# Altium PCB PCB_SequenceCounter.PcbDoc
Units mil, origin at the board's own origin, x right, y up, seen from the top; angles counter-clockwise.
Board outline 3293.81 x 1300.98 mil, 2 copper layers (Top Layer, Bottom Layer), stack 65.792 mil thick; 28 components, 26 nets, 77 pads, 14 vias.
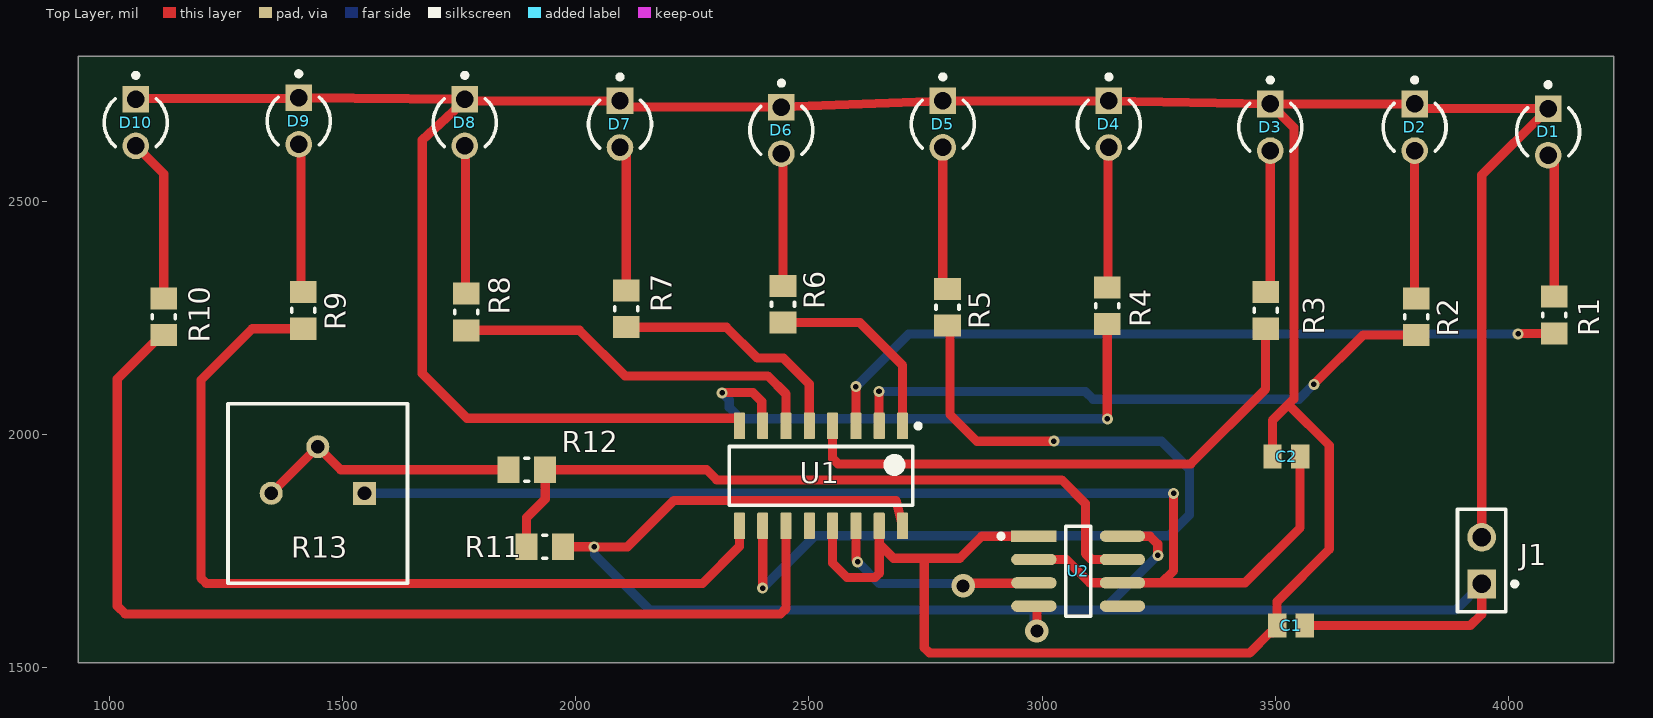
[diagram p0: Top Layer view]
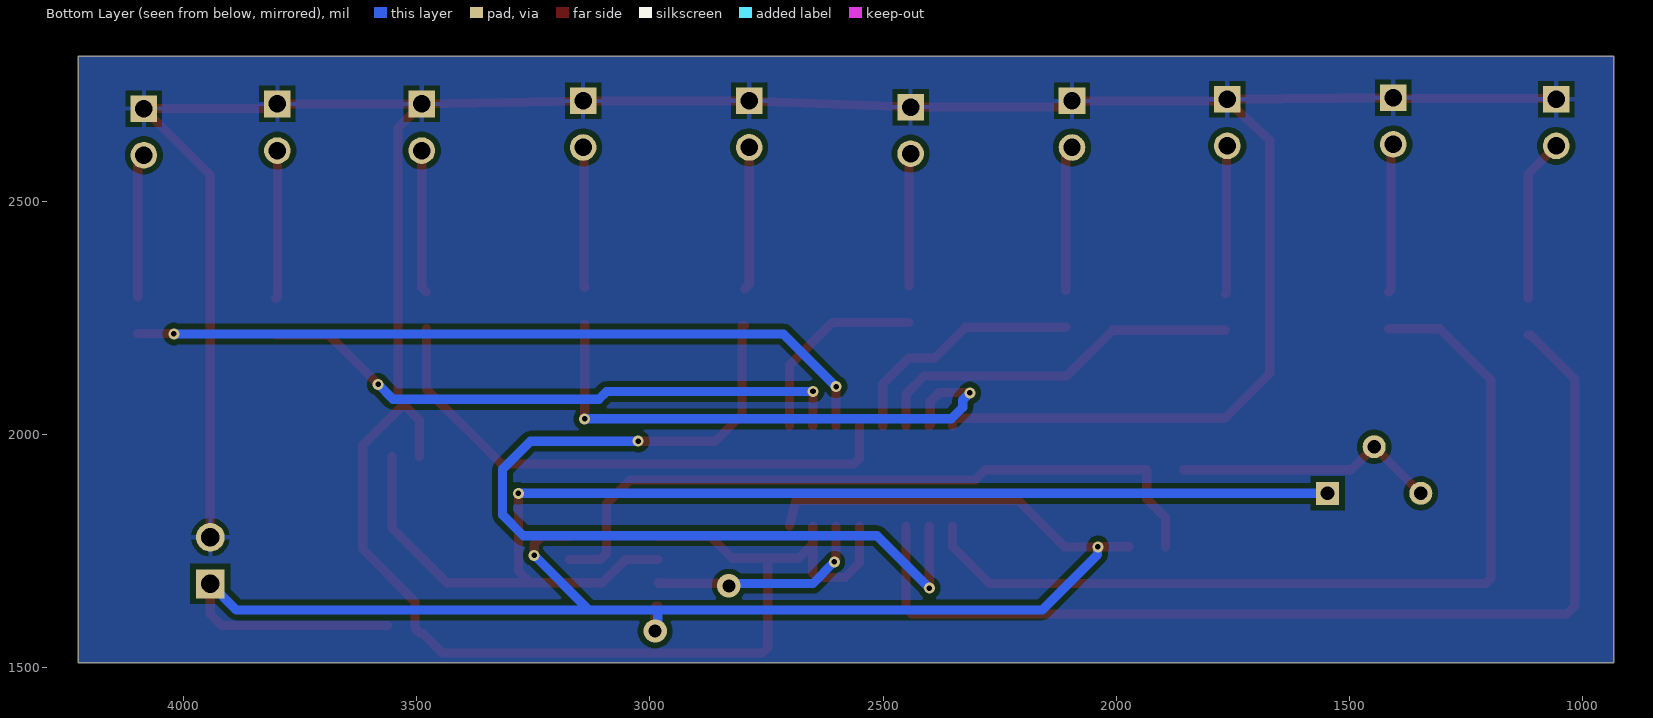
[diagram p1: Bottom Layer view, seen from below]
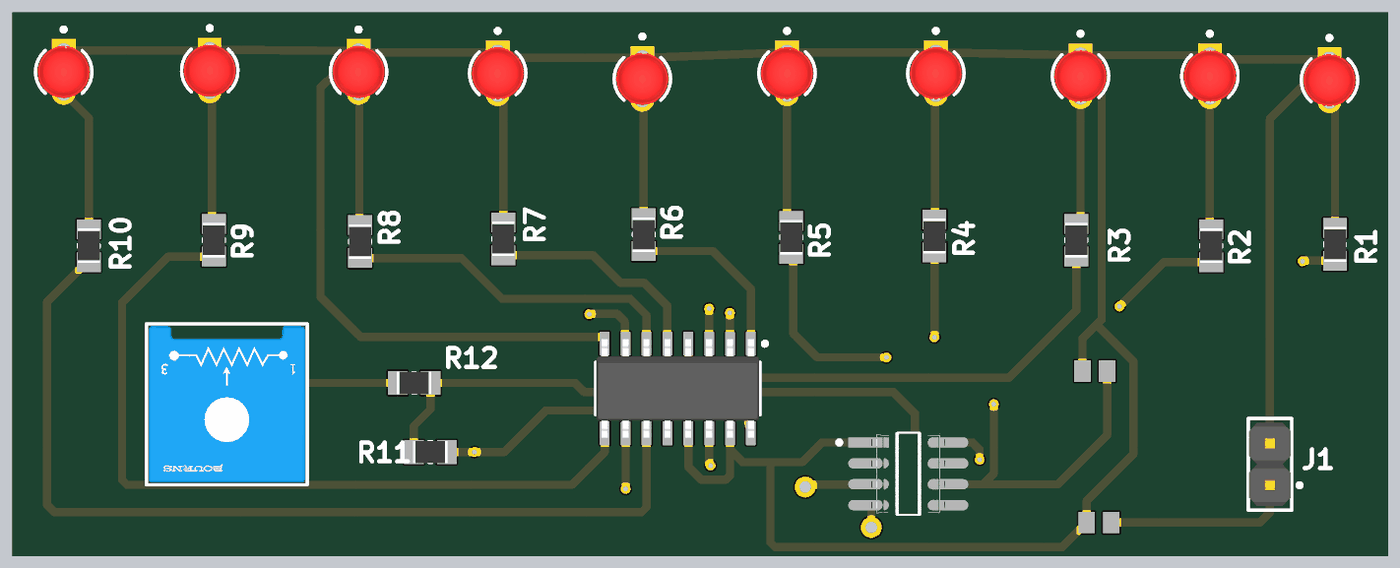
[diagram p2: 3D render of the assembled board from above, using the file's embedded part models]

## Layer stack, top to bottom
Top Solder: solder mask 0.4, Solder Resist, Dk 3.5
Top Layer: signal copper 1.4
Dielectric 1: dielectric 62.9921, FR-4, Dk 4.8
Bottom Layer: signal copper 1.4
Bottom Solder: solder mask 0.4, Solder Resist, Dk 3.5

## Board outline
932.56,1510.18 4226.38,1510.18 4226.38,2811.16 932.56,2811.16

## Design rules (kind name [scope] priority, off if disabled: settings)
Clearance [All] p1: gap=11.81 ignorepadtopadclearanceinfootprint=FALSE
PolygonConnect [All] p1: connectstyle=Relief reliefconductorwidth=10 reliefentries=4 polygonreliefangle="90 Angle" airgapwidth=10
RoutingVias [All] p1: holewidth=11.81 width=23.62 viastyle="Through Hole" minholewidth=11.81 minwidth=23.62 maxholewidth=11.81 maxwidth=23.62
SilkToSolderMaskClearance [IsPad] p1: minsilkscreentomaskgap=3.94 clearancetoexposedcopper=TRUE
SolderMaskExpansion [All] p1: expansion=4 istentingtop=FALSE
UnRoutedNet [All] p1: checkbadconnections=TRUE
Width [All] p1: maxlimit=39.37 minlimit=11.81 preferedwidth=19.68 minimp=50.000000 maximp=50.000000 favimp=50.000000
28 further rules are at their usual default settings.

## Components (designator, comment, footprint, x,y, rotation, side; value= is the part's Value field where it differs from the comment)
C1 "1uF" CAPC2013X135X45LL10T25 3533.92,1590.04 r0 top
C2 "GRM21BR71H105KA12L" CAPC2013X135X45LL10T25 3524.12,1952.66 r0 top
D1 "HLMP-1301" FP-HLMP-1301-MFG 4085.77,2649.1 r270 top
D2 "HLMP-1301" FP-HLMP-1301-MFG 3799.41,2659.09 r270 top
D3 "HLMP-1301" FP-HLMP-1301-MFG 3489.75,2659.09 r270 top
D4 "HLMP-1301" FP-HLMP-1301-MFG 3143.46,2665.75 r270 top
D5 "HLMP-1301" FP-HLMP-1301-MFG 2787.18,2665.8 r270 top
D6 "HLMP-1301" FP-HLMP-1301-MFG 2440.89,2652.43 r270 top
D7 "HLMP-1301" FP-HLMP-1301-MFG 2094.6,2665.75 r270 top
D8 "HLMP-1301" FP-HLMP-1301-MFG 1761.62,2669.08 r270 top
D9 "HLMP-1301" FP-HLMP-1301-MFG 1405.34,2672.41 r270 top
D10 "HLMP-1301" FP-HLMP-1301-MFG 1055.72,2669.08 r270 top
J1 "M20-9990245" FP-M20-9990245-MFG 3943.22,1729.48 r90 top
R1 "RC0805FR-071KL" RESC2013X60X35ML10T20 4099.09,2256.19 r90 top
R2 "RC0805FR-071KL" RESC2013X60X35ML10T20 3802.74,2252.86 r90 top
R3 "RC0805FR-071KL" RESC2013X60X35ML10T20 3479.76,2266.18 r90 top
R4 "RC0805FR-071KL" RESC2013X60X35ML10T20 3140.13,2276.17 r90 top
R5 "RC0805FR-071KL" RESC2013X60X35ML10T20 2797.17,2272.84 r90 top
R6 "RC0805FR-071KL" RESC2013X60X35ML10T20 2444.22,2279.5 r90 top
R7 "RC0805FR-071KL" RESC2013X60X35ML10T20 2107.91,2269.51 r90 top
R8 "RC0805FR-071KL" RESC2013X60X35ML10T20 1764.95,2262.85 r90 top
R9 "RC0805FR-071KL" RESC2013X60X35ML10T20 1415.33,2266.18 r90 top
R10 "RC0805FR-071KL" RESC2013X60X35ML10T20 1115.66,2252.86 r90 top
R11 "RC0805FR-071KL" RESC2013X60X35ML10T20 1933.41,1758.93 r0 top
R12 "10k" RESC2013X60X35ML10T20 1894.73,1924.42 r0 top
R13 "3386P-1-104LF" FP-3386P-MFG 1446.27,1873.17 r180 top
U1 "CD4017BM" D0016A_N 2525.8,1911.05 r270 top
U2 "NE555DR" FP-D0008A-IPC_A 3077.48,1706.82 r0 top

## Footprints (in the part's own frame and the unit in brackets; to place one, negate y for a bottom-side part, rotate by r counter-clockwise, add the part's x,y. Pads: shape width x height; smd on the part's side, far side on the other; paste and mask are expansions set on the pad)
CAPC2013X135X45LL10T25 [mm] "Chip Capacitor, 2-Leads, Body 2.00x1.25mm, IPC High Density"
  rect 1x1.3 smd: 1(-0.75,0) 2(0.75,0)
  body extent -1.05,-0.67 1.05,0.68, height 1.35
D0016A_N [mm] "SOIC, 16-Leads, Body 10x4mm, Pitch 1.27mm, IPC Medium Density"
  rrect17% 1.45x0.6 smd: 1(-2.725,4.445) 2(-2.725,3.175) 3(-2.725,1.905) 4(-2.725,0.635) 5(-2.725,-0.635) 6(-2.725,-1.905) 7(-2.725,-3.175) 8(-2.725,-4.445) 9(2.725,-4.445) 10(2.725,-3.175) 11(2.725,-1.905) 12(2.725,-0.635) 13(2.725,0.635) 14(2.725,1.905) 15(2.725,3.175) 16(2.725,4.445)
  silkscreen extent -2.85,-5 1.6,5.42, body extent -3,-4.95 3,4.95, height 1.59
FP-3386P-MFG [mm]
  rect 1.25x1.25 hole 0.75 paste-1000 mask+0: 1(-2.54,-0.015)
  round 1.25 hole 0.75 paste-1000 mask+0: 2(0,-2.555) 3(2.54,-0.015)
  silkscreen extent -4.89,-4.89 4.89,4.89, body extent -4.99,-4.99 4.99,4.99, height 0.25
FP-D0008A-IPC_A [mil]
  rect 97.21x24.49 smd paste+0 mask+0: 1(-95.02,75)
  rrect100% 97.21x24.49 smd paste+0 mask+0: 2(-95.02,25) 3(-95.02,-25) 4(-95.02,-75) 5(95.02,-75) 6(95.02,-25) 7(95.02,25) 8(95.02,75)
  silkscreen extent -170,-97 27,97, body extent -163,-116 163,116, height 10
FP-HLMP-1301-MFG [mm]
  rect 1.45x1.45 hole 0.95 paste-1000 mask+0: 1(-1.27,0)
  round 1.45 hole 0.95 paste-1000 mask+0: 2(1.27,0)
  silkscreen extent -2.7,-1.71 1.3,1.71, body extent -2.22,-2.22 2.22,2.22, height 0.25
FP-M20-9990245-MFG [mm]
  rect 1.57x1.57 hole 1.02 paste-1000 mask+0: 1(-1.27,0)
  round 1.57 hole 1.02 paste-1000 mask+0: 2(1.27,0)
  silkscreen extent -2.79,-1.92 2.79,1.32, body extent -2.89,-1.42 2.89,1.42, height 0.25
RESC2013X60X35ML10T20 [mm] "Chip Resistor, 2-Leads, Body 2.1x1.35mm, IPC Low Density"
  rect 1.2x1.45 smd: 1(-1,0) 2(1,0)
  silkscreen extent -0.1,-0.63 0.1,0.63, body extent -1.05,-0.68 1.05,0.67, height 0.6

## Part data
C1: library part CMP-1036-04761-2, Manufacturer=Murata, Part Number=GRM21BR71H105KA12L
C2: library part CMP-1036-04761-2, Manufacturer=Murata, Part Number=GRM21BR71H105KA12L
D1 D2 D3 D4 D5 D6 D7 D8 D9 D10: library part CMP-18399-000007-1, "LED RED DIFFUSED T-1 T/H", Colour=Red, Forward Current=10mA, Forward Voltage=1.9V, Manufacturer=Broadcom, Max Junction Temp=+110°C, Package=0, Reverse Voltage=5V, Temperature="-40°C to +100°C", Temperature Range High=+100°C, Temperature Range Low=-40°C, Automotive=No, Category=Diode, ComponentLink2Description=Datasheet, ComponentLink2URL=https://docs.broadcom.com/docs/AV02-1555EN, Device Class L1=Optoelectronics, Device Class L2=LEDs, Device Class L3=unset, Digikey Description="LED RED DIFFUSED T-1 T/H", Lead Free=Yes, Led Orientation=Straight, Luminous Intensity=3.4mcd, Manufacturer Part Number=HLMP-1301, Mouser Description="Standard LEDs - Through Hole Red Diffused 635nm 3.4mcd", Octopart=https://octopart.com/hlmp-1301-broadcom-71130345, Peak Emmision Wavelength=635nm, RoHS=TRUE, Viewing Angle=60°, Wavelength=626nm
J1: library part CMP-15831-000105-1, "CONN HEADER VERT 2POS 2.54MM", Case/Package=SIL, Color=Black, Contact Resistance=25mR, Current=3A, Flammability Rating="UL94 V-0", Insulation Resistance=10GR, Max Operating Temperature=105°C, Min Operating Temperature=-40°C, Package Quantity=1000, Voltage=50V, Voltage Rating (AC)=750V, Connector Type="Male Pin", Contact Finish - Mating=GOLD, Contact Material=Brass, Contact Mating Length=0.24inch, Contact Plating=Gold, Contact Shape=Square, Contact Type="Male Pin", Current Rating=3A, Depth=2.54mm, Fastening Type=Pull, Gender=Male, Height=0.12inch, Housing Color=Black, Housing Material=Nylon, Insulation Color=Black, Insulation Material=Nylon, Lead Pitch=2.54mm, Length=5.08mm, Mated Stacking Heights=16.54mm, Mating Cycles=300, Max Current Rating=3A, Mount="Through Hole", Number of Contacts=2, Number of Poles=2, Number of Positions=2, Number of Rows=1, Orientation=Straight, Packaging=Bulk, Pitch=2.54mm, Radiation Hardening=No, Reach SVHC Compliant=Yes, Series=M20, Termination=Solder, Weight=0.25lb, Width=0.25inch, Working Voltage=750V
R1 R2 R3 R4 R5 R6 R7 R8 R9 R10 R11 R12: library part CMP-2100-03671-1, "Chip Resistor, 1 KOhm, +/- 1%, 125 mW, -55 to 155 degC, 0805 (2012 Metric), RoHS, Tape and Reel", Case Code (Imperial)=0805, Case Code (Metric)=2012, Manufacturer=Yageo, Max Operating Temperature=155degC, Max Power Dissipation=125mW, Min Operating Temperature=-55degC, Package Description="2-Pin Surface Mounted Device, Body 2 x 1.25 mm", Package Quantity=1, Resistance=1KOhm, Temperature Coefficient=100ppm/degreesC, Tolerance=1%, Voltage Rating=150V, Case/Package=0805, Composition=ThickFilm, Datasheet URL=http://www.yageo.com/NewPortal/yageodocoutput?fileName=/pdf/R-Chip/PYu-RC_Group_51_RoHS_L_5.pdf, Datasheet Version="Rev. 5, 10/2016", Depth=1.25mm, Height=0.024inch, Lead Free=LeadFree, Length=0.079inch, Manufacturer URL=http://www.yageo.com/, Military Standard=Not, Number of Pins=2, Number of Terminations=2, Package Reference=0805, Packaging=TapeandReel, Power Rating=125mW, REACH SVHC=Unknown, RoHSCompliant=true, Termination=SMD/SMT, Voltage Rating (DC)=150V, Width=0.049inch
R13: library part CMP-2000-05592-8, "TRIMMER 100K OHM 0.5W PC PIN TOP", Color=Blue, Manufacturer Series=3386, Max Operating Temperature=125°C, Max Power Dissipation=500mW, Min Operating Temperature=-55°C, Package Quantity=100, Resistance=100kR, Resistance Law=Linear, Resistance Tolerance=10%, Resistor Type=Cermet, Temperature Coefficient=100ppm/°C, Voltage Rating=300V, Actuator Orientation=Vertical, Actuator Type=SCREW, Contact Plating=Tin, Depth=9.53mm, Height=4.83mm, Lead Free="Contains Lead", Length=9.53mm, Military Standard=Not, Mount="Through Hole", Number of Pins=3, Number of Terminals/Pins=3, Number of Turns=1, Packaging=Rail/Tube, Power Rating=500mW, Radiation Hardening=No, Reach SVHC Compliant=Yes, RoHS Compliant=Yes, Series="Trimpot® 3386 - Sealed", Taper=Linear, Technology=CERMET, Terminal Finish=Tin, Termination=Pin, Tolerance=10%, Type=Potentiometer, Weight=0.03oz, Width=9.53mm
U1: library part CMP-1623-00071-2, "CMOS Decade Counter with 10 Decoded Outputs, D0016A, TUBE", F @ Nom Voltage(Max)(Mhz)=8, Generic Part Number=CD4017B, ICC @ Nom Voltage(Max)(mA)=0.03, Manufacturer="Texas Instruments", Operating Temperature Range(C)="-55 to 125", Rating=Military, tpd @ Nom Voltage(Max)(ns)=270, Voltage(Nom)(V)=10, Bits(#)=10, Code_JEDEC="MS-012 variation AC", DatasheetVersion=SCHS027C, Function=Counter, Input Type=CMOS, Inputs=1, Output Drive (IOL/IOH)(Max)(mA)=1.5/-1.5, Output Type=CMOS, PackageReference=D0016A, Schmitt Trigger=No, Technology Family=CD4000, Type=Decade, VCC(Max)(V)=18, VCC(Min)(V)=3
U2: library part CMP-1685-00007-2, "IC OSC SGL TIMER 100KHZ 8-SOIC", Case/Package=SOIC, Frequency=100kHz, High Level Output Current=-200mA, Low Level Output Current=200mA, Max Operating Temperature=70°C, Max Supply Voltage=16V, Min Operating Temperature=0°C, Min Supply Voltage=4.5V, Operating Supply Current=10mA, Package Quantity=2500, Quiescent Current=15mA, Contact Plating=Gold, Height=1.58mm, Lead Free="Lead Free", Length=4.9mm, Mount="Surface Mount", Number of Pins=8, Number of Timers/Counters=1, Packaging="Tape and Reel", Radiation Hardening=No, REACH SVHC="No SVHC", Weight=0.002561oz, Width=3.91mm

## Via types
v1: diameter 23.62, hole 11.81, Top Layer to Bottom Layer, 12 vias
v2: diameter 50, hole 28, Top Layer to Bottom Layer, 2 vias

## Nets (pads, with @x,y where several pads share a name; then routed paths per layer and width w, separated by ;. In a path a pad name is that pad's centre, name@x,y a point inside that pad or via, vN(x,y) a via of type N, cw(c..) or ccw(c..) an arc to the next point about the centre after c; other vN are vias at no path point)
GND: C1.1 C2.1 D1.1 D2.1 D3.1 D4.1 D5.1 D6.1 D7.1 D8.1 D9.1 D10.1 J1.2 U1.8 U1.13 U1.15 U2.1 | length 8380.6
  Top Layer w19.68: D10.1 1057.39,2720.74 1405.34,2720.74 D9.1 D8.1 D8.1@1761.62,2715.75 ; U1.8 2350.79,2032.81 2348.83,2034.78 1766.41,2034.78 1670.4,2130.79 1670.4,2631.97 D8.1@1761.62,2715.75 ; U1.13 2550.79,1724.12 2581.94,1692.97 2641.51,1692.97 2650.79,1702.25 2650.79,1765.12 ; U1.15 2650.79,1765.12 ; D5.1 D5.1 ; U2.1 2870.6,1781.82 2823.34,1734.57 2752.34,1734.57 ; C2.1 3494.59,2030.57 3528.47,2064.45 ; C1.1 3504.39,1584.13 3494.55,1574.29 3488.64,1574.29 3445.44,1531.09 2758.82,1531.09 2747.29,1542.62 2747.29,1729.51 2752.34,1734.57 ; C1.1@3504.39,1593.57 3504.39,1641.57 3616.41,1753.59 3616.41,1976.5 3528.47,2064.45 ; J1.2 3943.22,2556.55 D1.1 3809.4,2699.1 D2.1 D3.1 ; D8.1@1761.62,2715.75 D7.1 2107.92,2702.43 D6.1 D5.1 ; 2650.79,1765.12 2681.34,1734.57 2752.34,1734.57 ; D5.1 D4.1 D3.1 ; D3.1 3540.34,2658.49 3540.34,2076.33 3528.47,2064.45
NetC2_2: C2.2 R13.1 U2.2 U2.6 | length 2732.3
  Top Layer w19.68: U2.2 3052.34,1731.82 3102.34,1681.82 U2.6 3256.34,1681.82 ; v1(3282.34,1873.57) 3282.34,1707.82 3256.34,1681.82 ; C2.2 3553.64,1799.87 3435.59,1681.82 3256.34,1681.82
  Bottom Layer w19.68: R13.1 3282.16,1873.76 v1(3282.34,1873.57)
NetD1_2: D1.2 R1.2 | length 309.1
  Top Layer w19.68: D1.2 4099.09,2585.78 R1.2
NetD2_2: D2.2 R2.2 | length 318.2
  Top Layer w19.68: D2.2 3799.41,2295.56 R2.2
NetD3_2: D3.2 R3.2 | length 307.7
  Top Layer w19.68: R3.2 3489.75,2315.54 D3.2
NetD4_2: D4.2 R4.2 | length 301.6
  Top Layer w19.68: R4.2 3141.79,2317.2 3141.79,2614.08 D4.2
NetD5_2: D5.2 R5.2 | length 307.7
  Top Layer w19.68: D5.2 2787.18,2322.2 R5.2
NetD6_2: D6.2 R6.2 | length 284.9
  Top Layer w19.68: D6.2 2444.22,2599.1 R6.2
NetD7_2: D7.2 R7.2 | length 312.4
  Top Layer w19.68: D7.2 2107.91,2602.43 R7.2
NetD8_2: D8.2 R8.2 | length 318.2
  Top Layer w19.68: D8.2 1763.29,2617.41 1763.29,2303.89 R8.2
NetD9_2: D9.2 R9.2 | length 321
  Top Layer w19.68: D9.2 1410.34,2617.41 1410.34,2310.55 R9.2
NetD10_2: D10.2 R10.2 | length 351.7
  Top Layer w19.68: D10.2 1115.66,2559.14 R10.2
NetR1_1: R1.1 U1.3 | length 1629.9
  Top Layer w19.68: U1.3 v1(2600.79,2102.57) ; v1(4021.34,2215.57) 4022.6,2216.82 R1.1
  Bottom Layer w19.68: v1(2600.79,2102.57) 2713.79,2215.57 v1(4021.34,2215.57)
NetR2_1: R2.1 U1.2 | length 1290.6
  Top Layer w19.68: v1(2650.26,2092.23) 2650.53,2091.96 2650.53,2018.6 U1.2 ; v1(3583.34,2107.57) 3689.27,2213.49 R2.1
  Bottom Layer w19.68: v1(2650.26,2092.23) 3093.01,2092.23 3109.66,2075.57 3551.34,2075.57 v1(3583.34,2107.57)
NetR3_1: R3.1 U1.4 | length 1199.3
  Top Layer w19.68: U1.4 2550.79,1948.54 2562.33,1937.01 3319.3,1937.01 3479.76,2097.47 R3.1
NetR4_1: R4.1 U1.7 | length 1208.1
  Top Layer w19.68: v1(2313.89,2088.99) 2314.64,2089.74 2379.96,2089.74 2398.83,2070.87 2398.83,2020.3 U1.7 ; v1(3140.13,2033.57) R4.1
  Bottom Layer w19.68: v1(2313.89,2088.99) 2329.03,2073.85 2329.03,2058.08 2353.54,2033.57 v1(3140.13,2033.57)
NetR5_1: R5.1 U1.10 | length 1969.7
  Top Layer w19.68: v1(2400.79,1670.57) U1.10 ; R5.1 2802.34,2233.47 2802.34,2043.54 2860.31,1985.57 v1(3025.34,1985.57)
  Bottom Layer w19.68: v1(2400.79,1670.57) 2512.97,1782.75 3271.52,1782.75 3316.34,1827.57 3316.34,1925.57 3256.34,1985.57 v1(3025.34,1985.57)
NetR6_1: R6.1 U1.1 | length 424.8
  Top Layer w19.68: R6.1 2609.25,2240.13 2700.79,2148.58 U1.1
NetR7_1: R7.1 U1.5 | length 533.4
  Top Layer w19.68: R7.1 2322.9,2230.14 2388.97,2164.07 2445.1,2164.07 2500.79,2108.37 U1.5
NetR8_1: R8.1 U1.6 | length 810.9
  Top Layer w19.68: R8.1 2007.57,2223.48 2105.27,2125.78 2411.78,2125.78 2450.79,2086.76 U1.6
NetR9_1: R9.1 U1.9 | length 1927.2
  Top Layer w19.68: R9.1 1305.52,2226.81 1195.39,2116.68 1195.39,1692.1 1206.92,1680.57 2271.79,1680.57 2350.79,1759.57 U1.9
NetR10_1: R10.1 U1.11 | length 2249.4
  Top Layer w19.68: R10.1 1110.73,2213.49 1016.13,2118.89 1016.13,1631.9 1033.02,1615.01 2439.26,1615.01 2450.79,1626.54 U1.11
NetR11_1: R11.1 R12.2 U2.7 | length 1562.9
  Top Layer w19.68: R11.1 1894.04,1821.57 1934.1,1861.63 R12.2 2280.5,1924.42 2302.34,1902.57 3042.34,1902.57 3093.34,1851.57 3093.34,1744.57 3106.09,1731.82 U2.7
NetR12_1: R12.1 R13.2 R13.3 | length 570.9
  Top Layer w19.68: R13.3 R13.2 1495.61,1924.42 R12.1
NetU1_14: U1.14 U2.3 | length 480.8
  Top Layer w19.68: U1.14 2600.79,1730.12 v1(2604.34,1726.57) ; v2(2830.77,1675.19) 2836.49,1680.9 2981.54,1680.9 U2.3
  Bottom Layer w19.68: v1(2604.34,1726.57) 2650.8,1680.12 2825.84,1680.12 v2(2830.77,1675.19)
VCC: C1.2 J1.1 R11.2 U1.16 U2.4 U2.8 | length 3640
  Top Layer w19.68: R11.2 1972.82,1758.97 v1(2038.95,1759.02) v1(2038.95,1759.02) 2039.04,1758.93 2110.7,1758.93 2210.34,1858.57 2686.79,1858.57 U1.16 ; U2.4@2984.18,1631.36 2982.92,1631.36 U2.4 2986.76,1631.82 2988.98,1629.6 v2(2988.98,1578.52) ; U2.8 3231.34,1781.82 3248.34,1764.82 v1(3248.34,1740.57) ; C1.2 3918.78,1590.04 3943.22,1614.48 J1.1
  Bottom Layer w19.68: v1(2038.95,1759.02) 2039.71,1758.27 2039.71,1742.57 2158.7,1623.57 2983.4,1623.57 ; v2(2988.98,1578.52) 2983.4,1584.1 2983.4,1623.57 ; v1(3248.34,1740.57) 3131.34,1623.57 ; J1.1 3887.32,1623.57 3131.34,1623.57 ; 2983.4,1623.57 3131.34,1623.57
pads on no net: U1.12 U2.5

## Polygon pours and split planes (outlines as drawn)
GND on Bottom Layer "GND_L02_P001" (solid, pour order 1): 933.55,1511.27 4226.39,1511.27 4226.34,1511.32 4226.34,2811.22 932.62,2811.22 932.56,2811.16 933.54,2810.17 933.54,1511.27